# Altium PCB board.PcbDoc (part 2 of 2)
Units mm, origin at the board's own origin, x right, y up, seen from the top; angles counter-clockwise.
Board outline 36 x 187 mm, 2 copper layers (Top Layer, Bottom Layer), stack 1.66 mm thick; 133 components, 67 nets, 336 pads, 161 vias.
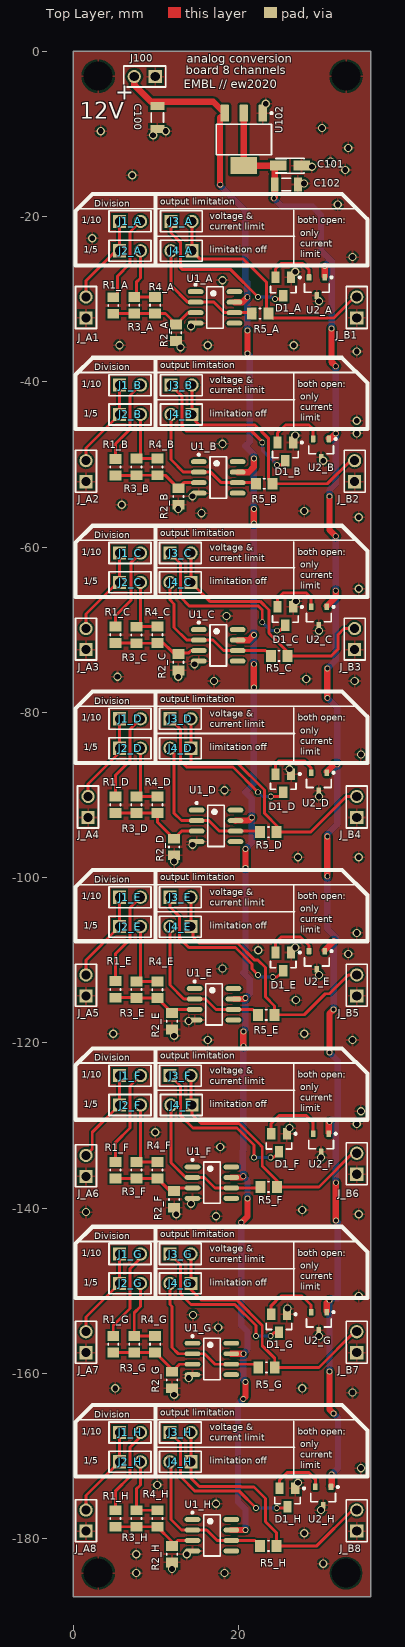
[diagram p0: Top Layer view]

## Silkscreen, mask and mechanical layers (free items; w line width, h text height) (continued)
M12_titleBlock: (continued)
  text "B" at 219.051,-68.135 h1.78
  text "C" at -67.969,-116.649 h1.78
  text "C" at 219.051,-116.649 h1.78
  text "ENGINEER:" at 104.116,-153.657 h1.14
  text "TITLE:" at 142.216,-153.657 h1.14
  text "PCB DESIGNER:" at 104.116,-161.15 h1.14
  text "D" at -67.969,-164.655 h1.78
  text "D" at 219.051,-164.655 h1.78
  text "EMBL - European" at 62.308,-167.322 h1.78
  text "DATE:" at 104.116,-168.897 h1.14
  text "PART NO.:" at 142.216,-168.897 h1.14
  text "REV:" at 195.556,-168.897 h1.14
  text "Molecular Biology Laboratory" at 68.658,-169.862 h1.78
  text "Meyerhofstrasse 1" at 68.658,-171.767 h1.78
  text ".Print_Date" at 105.386,-171.945 h1.78
  text "69117 Heidelberg" at 68.658,-174.942 h1.78
  text "FILE NAME:" at 104.116,-176.517 h1.14
  text "DWG NO:" at 142.216,-176.517 h1.14
  text "SCALE:" at 195.556,-176.517 h1.14
  text "Germany" at 68.658,-177.8 h1.78
  text ".PCB_FILE_NAME_NO_PATH" at 105.386,-179.565 h1.78
  text "1" at -33.628,-185.026 h1.78
  text "3" at 112.168,-185.026 h1.78
  text "4" at 185.066,-185.026 h1.78